# EAGLE board rbccpsiisc_nRF24Cheep (EAGLE 7.3.0)
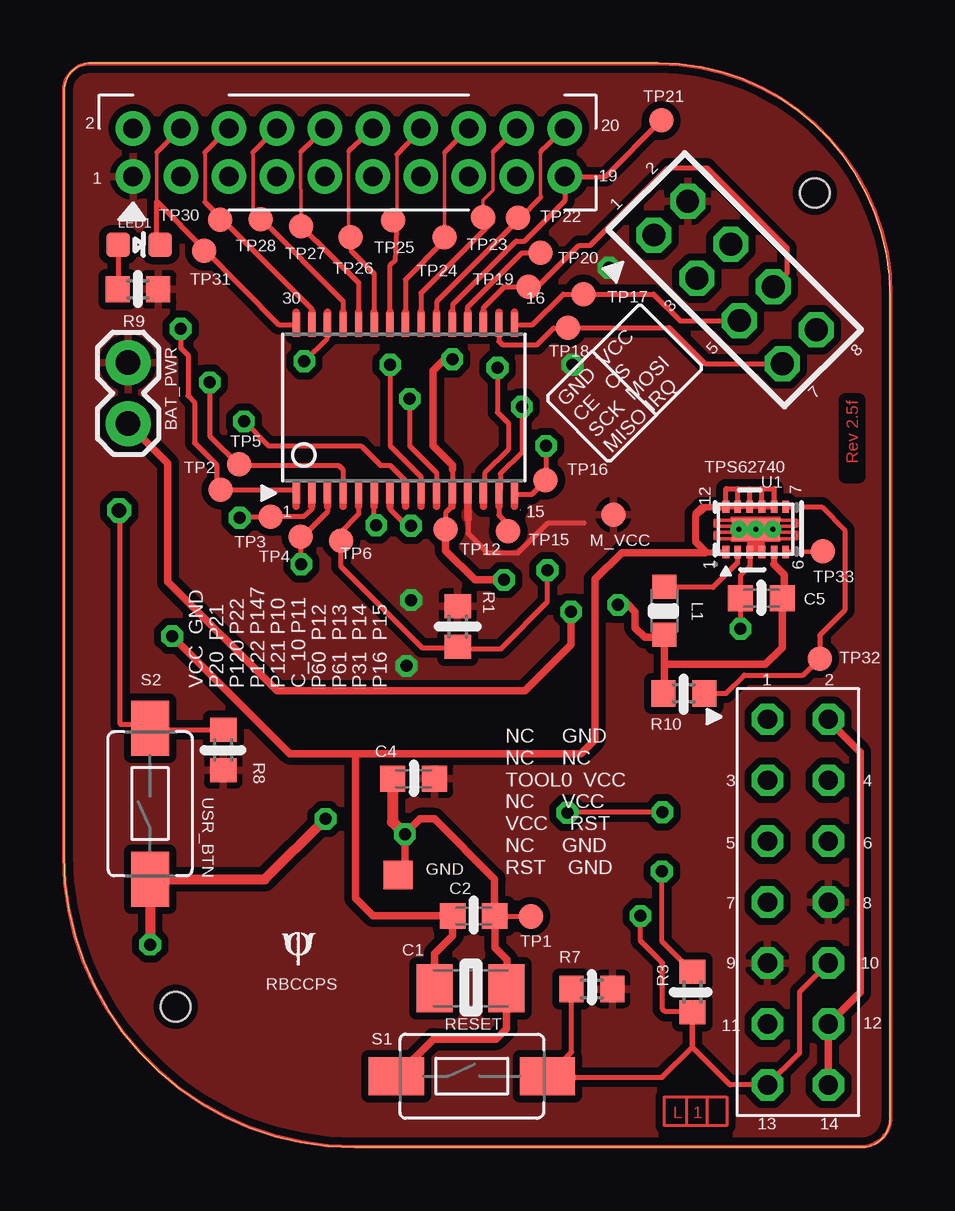
[diagram p0: board, top side]
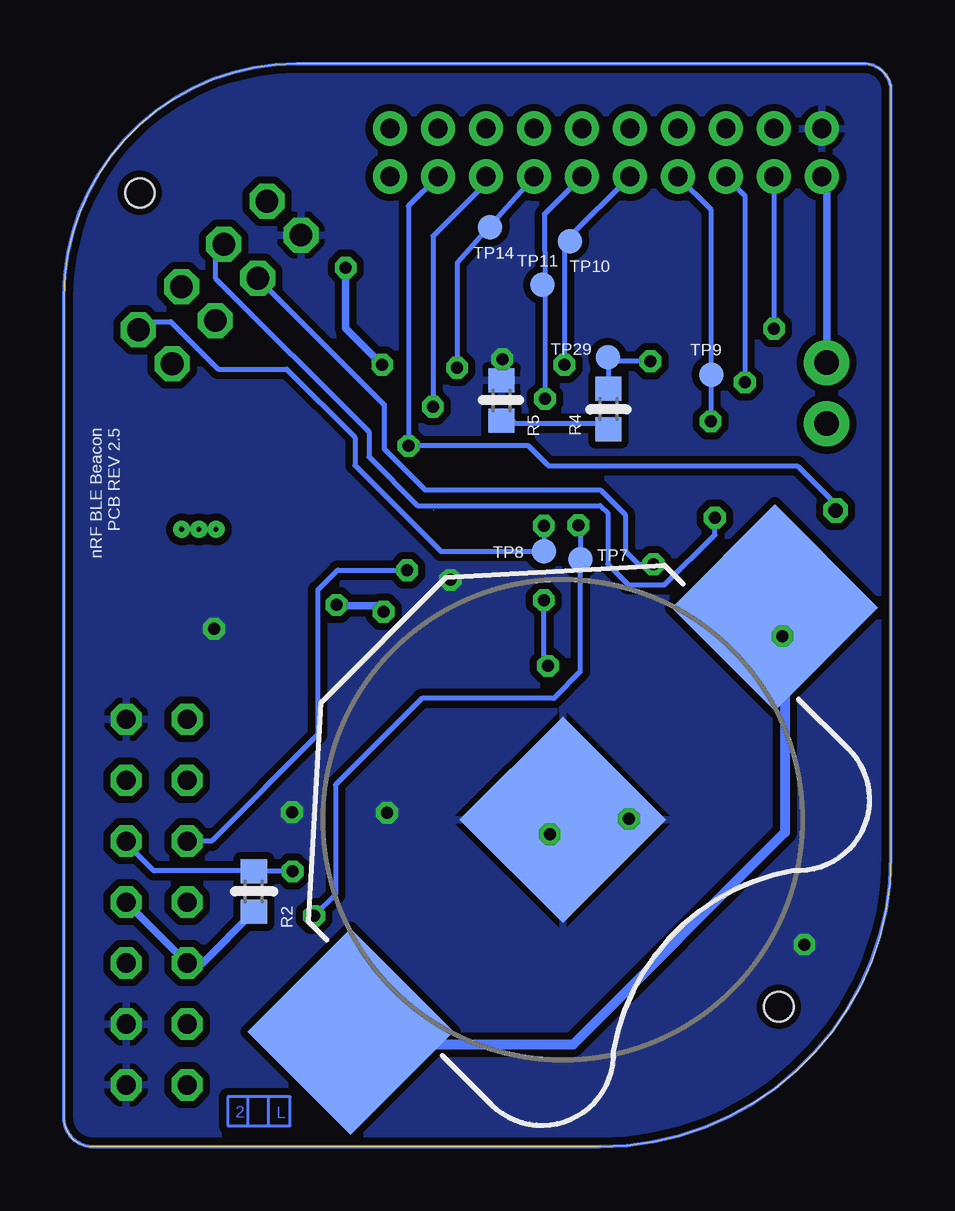
[diagram p1: board, bottom side, seen from below]

Size 34.47 x 45.15 mm. Coordinates in mm from the lower left corner, seen from the top.
Outline: 19.05,26.53 19.05,26.56
Outline: 24.76,45.15 1.16,45.15 arc90 0,43.99 0,12.08 arc90 12.16,0 33.35,0 arc90 34.47,1.27 34.47,35.45 arc90 24.76,45.15
Copper layers (1*16): Top 0.035mm / dielectric 1.5mm / Bottom 0.035mm
Design rules "default *": minimum track width 8mil, minimum drill 10mil, track to track 6mil, track to pad 6mil, pad to pad 6mil, via to via 6mil, smd to smd 1mil, copper to edge 8mil, drill to drill 8mil, minimum pad ring 10mil, minimum via ring 8mil, stop-mask expansion 4mil, vias tented up to drill 20mil, thermal gap 10mil
Net classes: 0 track: width 0.203 mm, drill 0.508 mm, clearance 0.203 mm; 1 power: width 0.305 mm, drill 0.508 mm, clearance 0.203 mm to class 0, clearance 0.203 mm
Holes 1.22 mm at 31.32,39.75 4.67,5.84

## Footprints (pad centres in the part's own frame; a part is rotated, then mirrored left to right if it is on the bottom)
BATTCON_20MM = smd 6.07 x 6.07: 1 -12.5,0; 2 0,0; 3 12.5,0
1X02 = drill 1.016 pad 1.88: 1 0,0; 2 2.54,0
C1206K = smd 1.5 x 2: 1 -1.5,0; 2 1.5,0
C0603K = smd 1.05 x 1.08: 1 -0.875,0; 2 0.875,0
2X10 = drill 0.8 pad 1.422: 1 -9,-1; 2 -9,1; 3 -7,-1; 4 -7,1; 5 -5,-1; 6 -5,1; 7 -3,-1; 8 -3,1; 9 -1,-1; 10 -1,1; 11 1,-1; 12 1,1; 13 3,-1; 14 3,1; 15 5,-1; 16 5,1; 17 7,-1; 18 7,1; 19 9,-1; 20 9,1
TP12SQ = smd 1.2 x 1.2: TP 0,0
L2012C = smd 1 x 1: 1 -1,0; 2 1,0
LED-0603 = smd 1 x 1: A 0,-0.877; C 0,0.877
BERG_NRF24_NRF24 = drill 0.95 octagon: 1 0.9,-3.79; 2 -1.1,-3.79; 3 0.9,-1.25; 4 -1.1,-1.25; 5 0.9,1.25; 6 -1.1,1.25; 7 0.9,3.79; 8 -1.1,3.79
R0603 = smd 1 x 1.1: 1 -0.85,0; 2 0.85,0
SSOP30_SSOP30 = smd 0.305 x 0.991: 1 -4.49,-3.718; 2 -3.84,-3.718; 3 -3.19,-3.718; 4 -2.54,-3.718; 5 -1.89,-3.718; 6 -1.24,-3.718; 7 -0.59,-3.718; 8 0.06,-3.718; 9 0.71,-3.718; 10 1.36,-3.718; 11 2.01,-3.718; 12 2.66,-3.718; 13 3.31,-3.718; 14 3.96,-3.718; 15 4.61,-3.718; 16 4.61,3.218; 17 3.96,3.218; 18 3.31,3.218; 19 2.66,3.218; 20 2.01,3.218; 21 1.36,3.218; 22 0.71,3.218; 23 0.06,3.218; 24 -0.59,3.218; 25 -1.24,3.218; 26 -1.89,3.218; 27 -2.54,3.218; 28 -3.19,3.218; 29 -3.84,3.218; 30 -4.49,3.218
TACTILE-SWITCH-1101NE = smd 2.3 x 1.6: P$1 -3.15,0; P$2 3.15,0
PAD.03X.04 = smd 1.016 x 1.016: P$1 0,0
DSS0012A = smd 0.508 x 0.279: 1 -1.575,1.245; 2 -1.575,0.762; 3 -1.575,0.254; 4 -1.575,-0.254; 5 -1.575,-0.762; 6 -1.575,-1.245; 7 0.305,-1.245; 8 0.305,-0.762; 9 0.305,-0.254; 10 0.305,0.254; 11 0.305,0.762; 12 0.305,1.245 | smd 0.889 x 2.007: 13 -0.635,0 | drill 0.203: V -0.635,0; V_2 -0.635,-0.711; V_3 -0.635,0.711
BERG_5_BERG_5 = drill 0.8 octagon: 1 -1.17,7.59; 2 1.37,7.59; 3 -1.17,5.05; 4 1.37,5.05; 5 -1.17,2.51; 6 1.37,2.51; 7 -1.17,-0.03; 8 1.37,-0.03; 9 -1.17,-2.57; 10 1.37,-2.57; 11 -1.17,-5.11; 12 1.37,-5.11; 13 -1.17,-7.65; 14 1.37,-7.65

## Placement (x,y rotation side)
BAT1  [BATTCON_20MM]  13.69,13.64 225 bottom
BAT_PWR  [1X02]  2.69,30.14 90 top
C1  100uF  [C1206K]  16.97,6.61 0 top
C2  10uF  [C0603K]  17.1,9.62 0 top
C4  0.1uF  [C0603K]  14.59,15.34 180 top
C5  10uF  [C0603K]  29.08,22.86 180 top
EXP  EXP_CONNECTOR  [2X10]  11.89,41.43 0 top
GND  TPSQTP12SQ  [TP12SQ]  13.94,11.33 0 top
L1  2.2uH  [L2012C]  25.05,22.34 270 top
LED1  [LED-0603]  3.15,37.59 270 top
NRFSOCKET  BERG_NRF24_NRF24  [BERG_NRF24_NRF24]  27.92,35.95 225 top
R1  1K  [R0603]  16.43,21.68 90 top
R2  1K  [R0603]  26.57,10.64 270 bottom
R3  10K  [R0603]  26.21,6.45 270 top
R4  10K  [R0603]  11.78,30.75 90 bottom
R5  10K  [R0603]  16.24,31.1 270 bottom
R7  510  [R0603]  22.02,6.58 180 top
R8  510  [R0603]  6.65,16.54 90 top
R9  330  [R0603]  3.1,35.74 180 top
R10  1M  [R0603]  25.86,18.9 0 top
RENASENCE  SSOP30_SSOP30  [SSOP30_SSOP30]  14.19,31.04 0 top
S1  SWITCH-MOMENTARY-2-SMD-1101NE  [TACTILE-SWITCH-1101NE]  17.02,2.95 0 top
S2  SWITCH-MOMENTARY-2-SMD-1101NE  [TACTILE-SWITCH-1101NE]  3.61,14.3 90 top
TP1  TEST-POINT3X4  [PAD.03X.04]  19.48,9.6 0 top
TP2  TEST-POINT3X4  [PAD.03X.04]  6.55,27.38 0 top
TP3  TEST-POINT3X4  [PAD.03X.04]  8.64,26.26 0 top
TP4  TEST-POINT3X4  [PAD.03X.04]  9.88,25.43 0 top
TP5  TEST-POINT3X4  [PAD.03X.04]  7.32,28.45 0 top
TP6  TEST-POINT3X4  [PAD.03X.04]  11.56,25.26 0 top
TP7  TEST-POINT3X4  [PAD.03X.04]  12.95,24.49 0 bottom
TP8  TEST-POINT3X4  [PAD.03X.04]  14.48,24.82 0 bottom
TP9  TEST-POINT3X4  [PAD.03X.04]  7.49,32.18 0 bottom
TP10  TEST-POINT3X4  [PAD.03X.04]  13.39,37.74 0 bottom
TP11  TEST-POINT3X4  [PAD.03X.04]  14.53,35.92 0 bottom
TP12  TEST-POINT3X4  [PAD.03X.04]  15.93,25.73 0 top
TP13  TEST-POINT3X4  [PAD.03X.04]  22.91,26.34 0 top
TP14  TEST-POINT3X4  [PAD.03X.04]  16.71,38.33 0 bottom
TP15  TEST-POINT3X4  [PAD.03X.04]  18.53,25.65 0 top
TP16  TEST-POINT3X4  [PAD.03X.04]  20.09,27.79 0 top
TP17  TEST-POINT3X4  [PAD.03X.04]  21.67,35.53 0 top
TP18  TEST-POINT3X4  [PAD.03X.04]  21.03,34.14 27.7 top
TP19  TEST-POINT3X4  [PAD.03X.04]  19.38,35.84 0 top
TP20  TEST-POINT3X4  [PAD.03X.04]  19.89,37.25 0 top
TP21  TEST-POINT3X4  [PAD.03X.04]  24.92,42.77 0 top
TP22  TEST-POINT3X4  [PAD.03X.04]  18.95,38.71 0 top
TP23  TEST-POINT3X4  [PAD.03X.04]  17.48,38.73 0 top
TP24  TEST-POINT3X4  [PAD.03X.04]  15.89,37.91 0 top
TP25  TEST-POINT3X4  [PAD.03X.04]  13.74,38.61 0 top
TP26  TEST-POINT3X4  [PAD.03X.04]  11.96,37.9 0 top
TP27  TEST-POINT3X4  [PAD.03X.04]  9.91,38.35 0 top
TP28  TEST-POINT3X4  [PAD.03X.04]  8.2,38.66 0 top
TP29  TEST-POINT3X4  [PAD.03X.04]  11.81,32.89 0 bottom
TP30  TEST-POINT3X4  [PAD.03X.04]  6.53,38.63 0 top
TP31  TEST-POINT3X4  [PAD.03X.04]  5.87,37.34 0 top
TP32  TEST-POINT3X4  [PAD.03X.04]  31.52,20.35 0 top
TP33  TEST-POINT3X4  [PAD.03X.04]  31.65,24.82 0 top
U1  [DSS0012A]  28.85,26.37 90 top
U$3  BERG_5_BERG_14  [BERG_5_BERG_5]  30.51,10.23 0 top

## Library data of the parts
BAT1 S1 S2 = SparkFun-Electromechanical
BAT_PWR = SparkFun-Retired
C1 C2 C4 C5 L1 R1-R5 R7-R10 = rcl
EXP = headers(2mm)
GND = testpad
LED1 = SparkFun-LED
NRFSOCKET RENASENCE U$3 = RBC_CPS_BOARD_REV1
TP1-TP33 = SparkFun-Passives
U1 = TPS62740; ADDRESS1: Not shown in title block; ADDRESS2: Not shown in title block; ADDRESS3: Not shown in title block; ADDRESS4: Not shown in title block; ALTERNATEMANUFACTURER: None; APPROVEDBY: Not shown in title block; AUTHOR: Not shown in title block; CHECKEDBY: Not shown in title block; COMPANYNAME: Not shown in title block; COMPONENTLINK1DESCRIPTION: Datasheet Link; COMPONENTLINK1URL: http://www.ti.com/lit/ds/symlink/tps62740.pdf; COMPTYPE: IC; CURRENTDATE: Not shown in title block; CURRENTTIME: Not shown in title block; DATE: Not shown in title block; DESIGNATOR: U?; DOCUMENTFULLPATHANDNAME: Not shown in title block; DOCUMENTNAME: Not shown in title block; DOCUMENTNUMBER: 1; ENGINEER: Not shown in title block; IMAGEPATH: Not shown in title block; LATESTREVISIONDATE: 2014-02-11; MANUFACTURER: Texas Instruments; MODIFIEDDATE: Not shown in title block; MOUNTTYPE: SMT; ORGANIZATION: Not shown in title block; PACKAGEREFERENCE: DSS0012A; PARTNUMBER: TPS62740DSS; PIN_COUNT: 13; PROJECTNAME: *; PUBLISHER: Texas Instruments; REVISION: Use project parameter SCH_Rev; ROHS: Y; RULE: *; SHEETNUMBER: 1; SHEETTOTAL: 1; SYMBOLCREATOR: a0411947; SYMBOLVERSION: 2014-02-03; TIME: Not shown in title block

## Nets
BYPASS: RENASENCE.19 TP20.P$1
C_10: EXP.11 RENASENCE.10 TP11.P$1
CE: NRFSOCKET.3 RENASENCE.3 TP4.P$1
CSN: NRFSOCKET.4 RENASENCE.2 TP3.P$1
GND [power]: BAT1.2 C1.2 C2.2 C4.2 C5.2 EXP.2 GND.TP NRFSOCKET.1 R5.1 RENASENCE.11 S1.P$1 S2.P$1 TP1.P$1 TP12.P$1 U1.3 U1.4 U1.13 U$3.2 U$3.12 U$3.14
IRQ: NRFSOCKET.8 RENASENCE.7 TP8.P$1
MISO: NRFSOCKET.7 RENASENCE.17 TP18.P$1
MOSI: NRFSOCKET.6 RENASENCE.18 TP19.P$1
N$2: LED1.A R9.2
N$4: TP33.P$1 U1.6
N$5: L1.1 U1.2
N$6: R10.2 TP32.P$1 U1.7
N$31: R4.1 R5.2
P10: EXP.10 RENASENCE.26 TP27.P$1
P11: EXP.12 RENASENCE.25 TP26.P$1
P12: EXP.14 RENASENCE.24 TP25.P$1
P13: EXP.16 RENASENCE.23 TP24.P$1
P14: EXP.18 RENASENCE.22 TP23.P$1
P15: EXP.20 RENASENCE.21 TP22.P$1
P16: EXP.19 RENASENCE.20 TP21.P$1
P20: EXP.3 RENASENCE.1 TP2.P$1
P21: EXP.4 LED1.C RENASENCE.30 TP31.P$1
P22: EXP.6 RENASENCE.29 TP30.P$1
P23: R4.2 RENASENCE.28 TP29.P$1
P31: EXP.17 R8.2 RENASENCE.15 S2.P$2 TP16.P$1
P60: EXP.13 RENASENCE.13 TP14.P$1
P61: EXP.15 RENASENCE.14 TP15.P$1
P120: EXP.5 RENASENCE.4 TP5.P$1
P121: EXP.9 RENASENCE.9 TP10.P$1
P122: EXP.7 RENASENCE.8 TP9.P$1
P147: EXP.8 RENASENCE.27 TP28.P$1
RESET: R3.2 R7.2 RENASENCE.6 S1.P$2 TP7.P$1 U$3.10 U$3.13
SCK: NRFSOCKET.5 RENASENCE.16 TP17.P$1
T_RESET: R2.1 R3.1 U$3.6
TOOL0: R1.1 RENASENCE.5 TP6.P$1 U$3.5
V_BATT: BAT1.1 C1.1 C2.1 U1.1 U1.8 U1.9 U1.10 U1.11 U1.12
V_OUT: BAT_PWR.1 C5.1 L1.2 R10.1 U1.5
VCC: BAT_PWR.2 C4.1 EXP.1 NRFSOCKET.2 R1.2 R2.2 R7.1 R8.1 R9.1 RENASENCE.12 TP13.P$1 U$3.8 U$3.9

## Tracks (layer width: path | path; a pad name or v marks a point on that pad's centre or on a via)
BYPASS
  Top 0.203: RENASENCE.19 16.85,35 19.1,37.25 TP20.P$1
C_10  (via drill 0.5)
  Top 0.203: v14.43,31.17 14.43,29.21 15.55,28.09 RENASENCE.10
  Bottom 0.203: EXP.11 14.45,38.87 14.43,35.77 | 14.43,35.77 v14.43,31.17 | TP11.P$1 14.56,35.89 14.43,35.77
CE  (via drill 0.5)
  Top 0.203: RENASENCE.3 11,26.47 9.96,25.43 TP4.P$1 9.91,25.4 v9.91,24.28
  Bottom 0.203: NRFSOCKET.3 21.13,30.93 21.13,29.08 19.43,27.38 12.12,27.38 11.07,26.34 11.07,24.82 10.54,24.28 v9.91,24.28
CSN  (via drill 0.5)
  Top 0.203: RENASENCE.2 10.35,26.55 10.01,26.26 TP3.P$1 7.39,26.26 v7.34,26.21
  Bottom 0.203: NRFSOCKET.4 28.17,37.26 28.17,36.2 21.77,29.79 21.77,28.75 19.74,26.72 12.12,26.72 11.81,26.42 11.81,24.28 10.95,23.42 9.45,23.42 7.34,25.5 v7.34,26.21
GND  (via drill 0.5)
  Top 0.203: 32.04,17.62 U$3.2 | RENASENCE.11 16.18,27.34 | 16.21,28.24 16.21,27.33 RENASENCE.11 | C2.2 17.99,9.6 | 17.99,9.6 TP1.P$1 | 17.99,9.6 arc90 17.98,9.59 | 18.49,6.64 C1.2 | U1.3 28.6,24.18 28.22,23.8 28.22,22.87 | 28.22,22.87 C5.2 | 28.22,22.87 v28.22,21.59 | C4.2 | 16.21,26.01 TP12.P$1 15.93,26.42 16.18,26.67 16.18,27.31 RENASENCE.11 | v24.97,13.94 21.01,13.94 v21.01,13.92
  Top 0.254: U1.13 28.6,25.73 U1.3 U1.4 29.11,25.5
  Top 0.305: U$3.14 U$3.12 33.2,6.44 33.2,16.45 32.04,17.62 | S1.P$1 15.42,4.5 18.03,4.5 18.47,4.93 C1.2 | 17.98,9.59 17.98,8.31 18.49,7.8 18.49,6.64 | C2.2 17.97,11.16 15.47,13.67 14.86,13.67 v14.22,13.03 14.22,11.61 GND.TP | TP12.P$1 15.93,24.84 17.15,23.62 v18.36,23.62 | v16.21,32.82 15.89,32.82 15.41,32.33 15.41,29.21 16.21,28.41 16.21,28.24
  Top 0.406: v10.92,13.67 8.38,11.15 S2.P$1 v3.61,8.43
  Top 0.457: C4.2 13.71,13.54 v14.22,13.03
  Bottom 0.203: v14.22,13.03 13.41,13.03 13.26,13.18 13.26,13.21 BAT1.2 | v10.92,13.67 13.51,13.74
  Bottom 0.457: 13.51,13.74 v14.22,13.03
  pour Bottom (isolate 0.305): -0.05,12.41 -0.03,44.04 arc-90 1.07,45.13 25.4,45.06 arc-89 34.53,35.43 34.54,1.47 arc-91 33.24,0.1 12.41,-0.03 arc-90
IRQ  (via drill 0.5)
  Top 0.203: RENASENCE.7 13.6,26.59 14.3,25.88 v14.48,25.88
  Bottom 0.203: NRFSOCKET.8 31.03,34.39 30.02,34.39 28.04,32.41 25.2,32.41 22.35,29.57 22.35,28.4 18.77,24.82 TP8.P$1 v14.48,25.88
MISO
  Top 0.203: RENASENCE.17 18.15,33.57 18.29,33.43 19.74,33.43 20.42,34.11 21.01,34.11 TP18.P$1 25.25,34.14 26.75,32.64 NRFSOCKET.7
MOSI
  Top 0.203: NRFSOCKET.6 30.15,36.41 30.15,37.47 26.82,40.79 25.2,40.79 21.97,37.57 21.49,37.57 19.76,35.84 TP19.P$1 18.38,35.84 17.5,34.96 RENASENCE.18
N$2
  Top 0.203: LED1.A 2.27,35.76 R9.2
N$4
  Top 0.203: U1.6 TP33.P$1
N$5
  Top 0.203: U1.2 28.09,24.33 27.08,23.32 25.07,23.32 L1.1
N$6
  Top 0.203: U1.7 31.6,26.67 32.56,25.7 32.56,22.35 31.52,21.31 TP32.P$1 | R10.2 27.61,18.9 28.37,19.66 30.84,19.66 TP32.P$1 | 31.5,20.32 TP32.P$1
N$7
  Bottom 0.406: 4.42,20.85 4.42,13.11 13.26,4.27 21.59,4.27 22.28,4.95
N$8
  Top 0.152: 0,12.12 0,44.02 arc-90 1.11,45.14 24.8,45.14 arc-90 34.49,35.45 34.49,1.25 arc-90 33.24,0 12.12,0 arc-90 0,12.12
N$9
  Bottom 0.152: 0,12.13 0,44 arc-90 1.14,45.14 24.79,45.14 arc-90 34.49,35.43 34.49,1.25 arc-90 33.24,0 12.13,0 arc-90 0,12.13
N$10
  Top 0.203: 27.61,26.89 27.61,27.43 28.09,27.43 | 28.09,27.43 28.09,26.81 | 28.09,27.43 28.59,27.43 | 28.59,27.43 28.59,26.85 | 28.59,27.43 29.06,27.43 29.1,27.43 | 29.1,27.43 29.1,26.89 | 29.1,27.43 29.62,27.43 29.62,26.84
N$11
  Top 0.406: 28.85,25.31 28.85,24.89
N$12
  Top 0.305: 18.8,34.79 18.8,34.46
N$13
  Top 0.305: 10.34,27.05 10.34,26.7
N$14
  Top 0.305: 11,27.06 11,26.7
N$15
  Top 0.305: 11.65,27.15 11.65,26.7
N$16
  Top 0.305: 12.29,27.01 12.29,26.7
N$17
  Top 0.305: 12.94,26.95 12.94,26.7
N$18
  Top 0.305: 13.6,27.09 13.6,26.7
N$19
  Top 0.305: 14.25,26.96 14.25,26.7
N$20
  Top 0.305: 9.69,27.03 9.69,26.7
N$21
  Top 0.305: 18.8,26.96 18.8,26.7
N$22
  Top 0.305: 14.9,26.96 14.9,26.7
N$23
  Top 0.305: 15.55,26.96 15.55,26.7
N$24
  Top 0.305: 16.19,26.96 16.19,26.7
N$25
  Top 0.127: 25.07,2.08 27.65,2.08 27.65,0.89
N$26
  Top 0.305: 17.5,26.96 17.5,26.7
N$27
  Top 0.305: 18.15,26.96 18.15,26.7
N$28
  Top 0.305: 18.15,34.79 18.15,34.46
N$29
  Top 0.305: 17.5,34.79 17.5,34.46
N$30
  Top 0.305: 16.85,34.79 16.85,34.46
N$31
  Bottom 0.203: 11.86,30.15 R4.1 12.03,30.15 15.65,30.15 16.19,30.69 R5.2
N$32
  Top 0.305: 16.19,34.79 16.19,34.46
N$33
  Top 0.305: 15.55,34.79 15.55,34.46
N$34
  Top 0.305: 14.9,34.79 14.9,34.46
N$35
  Top 0.305: 14.25,34.79 14.25,34.46
N$36
  Top 0.305: 13.6,34.79 13.6,34.46
N$37
  Top 0.305: 12.94,34.79 12.94,34.46
N$38
  Top 0.305: 12.29,34.79 12.29,34.46
N$39
  Top 0.305: 11.65,34.79 11.65,34.46
N$40
  Top 0.305: 11,34.79 11,34.46
N$41
  Top 0.305: 9.69,34.79 9.69,34.46
N$42
  Top 0.305: 10.35,34.79 10.35,34.46
N$43
  Top 0.127: 27.65,0.89 25.04,0.89 25.04,2.08
N$44
  Top 0.127: 25.97,2.07 25.97,0.91
N$45
  Top 0.127: 26.78,2.08 26.82,2.08 26.82,0.91
N$46
  Bottom 0.127: 25.97,2.08 25.04,2.08 25.04,0.89 26.82,0.89 | 25.97,2.08 26.82,2.08 | 26.82,2.08 27.65,2.08 27.65,0.89 26.82,0.89 | 25.97,2.08 25.97,0.9 | 26.82,2.08 26.82,0.89
P10
  Top 0.152: 9.88,41.45 TP27.P$1
  Top 0.203: EXP.10 9.88,41.45 | TP27.P$1 12.3,36.01 RENASENCE.26
P11
  Top 0.152: 11.89,41.48 11.89,37.85
  Top 0.203: EXP.12 11.89,41.48 | RENASENCE.25 12.95,36.38 11.99,37.34 11.89,37.85 TP26.P$1
P12
  Top 0.152: 13.89,41.36 13.89,38.63
  Top 0.203: EXP.14 13.89,41.36 | RENASENCE.24 13.6,36.71 13.82,36.93 13.89,38.63 13.77,38.63 TP25.P$1
P13
  Top 0.152: 15.89,41.43 TP24.P$1
  Top 0.203: RENASENCE.23 14.25,36.14 15.89,37.78 TP24.P$1 | EXP.16 15.89,41.43
P14
  Top 0.152: 17.9,41.45 17.9,41.44 17.9,39.87 17.48,39.45 TP23.P$1
  Top 0.203: EXP.18 17.9,41.45 | RENASENCE.22 14.9,35.57 17.88,38.56 17.9,38.76 17.5,38.76 TP23.P$1
P15
  Top 0.152: 19.89,41.46 19.89,39.57
  Top 0.203: EXP.20 19.89,41.46 | 19.89,39.57 18.99,38.65 | 18.99,38.65 15.55,35.21 RENASENCE.21 | TP22.P$1 18.99,38.67 18.99,38.65
P16
  Top 0.203: EXP.19 20.89,39.42 19.22,37.74 18.86,37.74 16.22,35.11 16.22,34.79 RENASENCE.20 | 20.88,40.43 EXP.19 | EXP.19 22.58,40.43 TP21.P$1
P20  (via drill 0.5)
  Top 0.203: v4.88,34.09 4.88,33.3 5.18,32.99 5.18,31.29 5.46,31.01 5.46,29.34 6.38,28.42 6.38,27.56 | 6.38,27.56 6.38,27.45 | 6.38,27.56 TP2.P$1 9.64,27.38 RENASENCE.1
  Bottom 0.203: EXP.3 4.88,40.42 v4.88,34.09
P21
  Top 0.152: 3.89,41.43 3.89,39.4
  Top 0.203: EXP.4 3.89,41.43 | 5.88,37.38 3.89,39.4 3.89,37.73 LED1.C | 5.88,37.38 8.97,34.26 RENASENCE.30 | TP31.P$1 5.88,37.35 5.88,37.38
P22
  Top 0.152: 5.89,41.44 5.89,39.37
  Top 0.203: EXP.6 5.89,41.44 | 5.89,39.37 6.5,38.76 | 6.5,38.76 10.35,34.92 RENASENCE.29 | TP30.P$1 6.5,38.66 6.5,38.76
P23  (via drill 0.5)
  Top 0.203: 10.97,34.24 RENASENCE.28 11,33.7 v10.03,32.74
  Bottom 0.203: R4.2 11.78,32.28 TP29.P$1 11.81,32.74 v10.03,32.74
P31  (via drill 0.5, 0.6)
  Top 0.203: v20.12,29.21 20.12,27.79 | 20.12,27.79 19.51,27.18 18.94,27.18 RENASENCE.15 | TP16.P$1 20.12,27.79 | 20.14,27.79 20.12,27.79 | R8.2 3.67,17.39 S2.P$2 3.61,17.6 2.36,17.6 2.36,26.34 v2.31,26.52
  Bottom 0.203: EXP.17 20.12,39.21 v20.12,29.21 15.11,29.21 14.28,28.37 3.91,28.37 2.31,26.77 v2.31,26.52
P60  (via drill 0.5)
  Top 0.203: v18.09,32.46 18.09,30.61 18.54,30.15 18.54,29.06 17.55,28.07 17.55,27.38 RENASENCE.13
  Bottom 0.203: EXP.13 16.77,38.31 | 16.77,38.31 18.09,36.83 v18.09,32.46 | TP14.P$1 16.73,38.31 16.77,38.31
P61  (via drill 0.5)
  Top 0.203: v19.1,30.84 19.1,28.93 18.21,28.04 18.21,27.39 RENASENCE.14 18.15,26.33 18.53,25.95 TP15.P$1
  Bottom 0.203: EXP.15 16.89,40.16 19.1,37.95 v19.1,30.84
P120  (via drill 0.5)
  Top 0.203: v6.1,31.85 6.1,29.62 7.32,28.4 | 7.32,28.4 11.46,28.4 11.65,28.21 RENASENCE.4 11.65,27.72 | 7.32,28.4 TP5.P$1
  Bottom 0.203: EXP.5 6.1,39.64 v6.1,31.85
P121  (via drill 0.5)
  Top 0.203: v13.61,32.59 13.61,29.21 14.9,27.93 RENASENCE.9
  Bottom 0.203: EXP.9 13.48,37.84 | 13.48,37.84 13.61,37.71 v13.61,32.59 | TP10.P$1 13.48,37.84
P122  (via drill 0.5)
  Top 0.203: v7.52,30.23 8.53,29.21 12.4,29.21 13.21,28.4 13.61,28.4 14.25,27.76 RENASENCE.8
  Bottom 0.203: EXP.7 7.52,39.06 7.52,32.39 7.52,32.21 | 7.52,32.21 v7.52,30.23 | TP9.P$1 7.52,32.21
P147
  Top 0.152: 7.9,41.44 7.9,38.99
  Top 0.203: EXP.8 7.9,41.44 | 7.9,38.99 8.2,38.68 | 8.2,38.68 11.65,35.24 RENASENCE.27 | TP28.P$1 8.2,38.68
RESET  (via drill 0.5)
  Top 0.203: 26.2,4.15 27.78,2.58 U$3.13 30.68,3.92 30.68,6.46 U$3.10 | 26.2,4.15 26.2,5.35 R3.2 | R3.2 26.21,4.22 | 26.2,4.15 24.95,2.9 20.22,2.9 S1.P$2 21.17,3.95 R7.2 | RENASENCE.6 12.93,27.31 12.93,26.01 v13.03,25.91 | R3.2 26.18,5.64 25.07,5.64 24.97,5.74 24.97,7.67 24.05,8.59 v24.05,9.63
  Bottom 0.203: v13.03,25.91 12.95,25.83 TP7.P$1 12.95,19.81 14.05,18.69 19.56,18.69 23.17,15.09 23.17,10.52 v24.05,9.63
SCK
  Top 0.203: RENASENCE.16 19.55,34.26 20.83,35.53 TP17.P$1 24.59,35.53 25.71,34.42 28.15,34.42 NRFSOCKET.5
T_RESET  (via drill 0.5)
  Top 0.203: 26.21,7.21 R3.1 24.94,8.57 v24.94,11.48
  Bottom 0.203: v24.94,11.48 24.95,11.49 R2.1 26.58,11.51 30.73,11.51 31.88,12.66 U$3.6
TOOL0  (via drill 0.5)
  Top 0.203: RENASENCE.5 12.3,26.38 11.56,25.64 TP6.P$1 11.56,24.18 14.94,20.8 16.4,20.8 R1.1 16.51,20.75 18.24,20.75 20.17,22.71 v20.17,24.03
  Bottom 0.203: U$3.5 28.33,12.74 23.9,17.17 23.9,23.19 23.06,24.03 v20.17,24.03 20.4,23.8
V_BATT  (via drill 0.5)
  Top 0.203: U1.10 U1.11 U1.12 | U1.10 U1.9 U1.8 | C1.1 | 26.89,24.77 27.58,24.77 U1.1 26.86,24.79 | U1.10 26.59,26.67 26.3,26.38 26.3,25.21 26.75,24.77 26.89,24.77 | 26.89,24.77 26.4,25.25 26.4,26.29 26.75,26.63 27.56,26.63
  Top 0.305: C1.1 15.47,8.05 16.22,8.8 C2.1 12.91,9.62 12.17,10.36 12.17,16.38 | v4.52,21.29 9.42,16.38 12.17,16.38 | 12.17,16.38 21.56,16.38 22.15,16.97 22.15,23.65 23.27,24.77 26.75,24.77
  Bottom 0.203: v4.52,21.29 4.52,22.15 BAT1.1
V_OUT  (via drill 0.5)
  Top 0.203: 30.05,22.95 C5.1 | 25.05,19.02 R10.1 | v23.11,22.58 23.55,22.58 | 24.95,21.23 L1.2
  Top 0.254: U1.5 29.62,24.28
  Top 0.305: 29.62,24.28 30.05,23.85 30.05,22.95 | L1.2 25.05,20.12 | 25.05,20.12 25.05,19.02 | C5.1 29.96,20.79 29.26,20.12 25.05,20.12 | BAT_PWR.1 4.34,28.48 4.34,23.55 8.89,19 19.23,19 21.16,20.93 v21.16,22.3 | 23.55,22.58 23.83,22.3 23.83,21.64 24.23,21.23 24.95,21.23
  Bottom 0.203: 23.09,22.58 v23.11,22.58
  Bottom 0.305: v21.16,22.3 21.41,22.56 23.06,22.56 23.09,22.58
VCC  (via drill 0.5)
  Top 0.025: 16.85,26.96 16.85,26.97 RENASENCE.12
  Top 0.203: 16.85,26.17 16.85,25.58 17.68,24.75 18.95,24.75 20.19,26 21.7,26
  Top 0.305: 16.85,26.96 16.85,26.17
  Bottom 0.203: v14.3,20.04 14.48,20.22 v14.48,22.78
  Bottom 0.305: U$3.8 U$3.9 28.7,7.66 R2.2 | BAT_PWR.2 2.69,40.23 EXP.1 | v22.73,36.63 22.73,34.11 v21.21,32.59
  pour Top (isolate 0.305): -0.15,11.74 0,44.08 arc-90 1.05,45.13 24.81,45.06 arc-90 34.54,35.33 34.54,1.52 arc-90 33.18,0.1 13.16,0.03 arc-90

## Text on the board
Top: Rev 2.5f | L | 1
Bottom: L | 2
tPlace: TP21 | TP30 | TP22 | TP28 | TP27 | TP25 | TP23 | TP20 | TP31 | TP26 | TP24 | TP19 | TP17 | TP18 | TP5 | GND VCC / CE CS / SCK MOSI / MISO IRQ | TP2 | TP16 | TPS62740 | 12 | 7 | TP3 | TP12 | TP15 | M_VCC | TP4 | TP6 | 1 | 6 | TP33 | TP32 | VCC GND / P20 P21 / P120 P22 / P122 P147 / P121 P10 / C_10 P11 / P60 P12 / P61 P13 / P31 P14 / P16 P15 | USR_BTN | NC GND / NC NC / TOOL0 VCC / NC VCC / VCC RST / NC GND / RST GND | TP1 | RBCCPS | RESET
bPlace: TP11 | TP14 | TP10 | TP9 | TP29 | nRF BLE Beacon / PCB REV 2.5 | TP7 | TP8
Notes: Copyright (c) [2015] [Robert Bosch Centre for Cyber Physical Systems, Indian Institute of Science, Bangalore] / / Permission is hereby granted, free of charge, to any person obtaining a copy / of this software and associated documentation files (the "Software"), to deal / in the Software without restriction, including without limitation the rights / to use, copy, modify, merge, publish, distribute, sublicense, and/or sell copies / of the Software, and to permit persons to whom the Software is / furnished to do so, subject to the following conditions: / / 1. Redistributions of source code must retain the above copyright notice, / this list of conditions and the following disclaimer. / 2. Redistributions in binary form must reproduce the above copyright notice, / this list of conditions and the following disclaimer in the documentation and/or / other materials provided with the distribution. / 3. Neither the name of the copyright holder nor the names of its contributors / may be used to endorse or promote products derived from this software / without specific prior written permission. / / The above copyright notice and this permission notice shall be included in all / copies or substantial portions of the Software. / / THE SOFTWARE IS PROVIDED "AS IS", WITHOUT WARRANTY OF ANY KIND, EXPRESS OR / IMPLIED, INCLUDING BUT NOT LIMITED TO THE WARRANTIES OF MERCHANTABILITY, / FITNESS FOR A PARTICULAR PURPOSE AND NONINFRINGEMENT. IN NO EVENT SHALL THE / AUTHORS OR COPYRIGHT HOLDERS BE LIABLE FOR ANY CLAIM, DAMAGES OR OTHER / LIABILITY, WHETHER IN AN ACTION OF CONTRACT, TORT OR OTHERWISE, ARISING FROM, / OUT OF OR IN CONNECTION WITH THE SOFTWARE OR THE USE OR OTHER DEALINGS IN THE / SOFTWARE. / ​